# Altium PCB ReceiverPCB.PcbDoc
Units mm, origin at the board's own origin, x right, y up, seen from the top; angles counter-clockwise.
Board outline 69.85 x 65.28 mm, 2 copper layers (Top Layer, Bottom Layer); 15 components, 35 nets, 128 pads, 1 vias.
Unrouted connection lines stored in the file: 1.
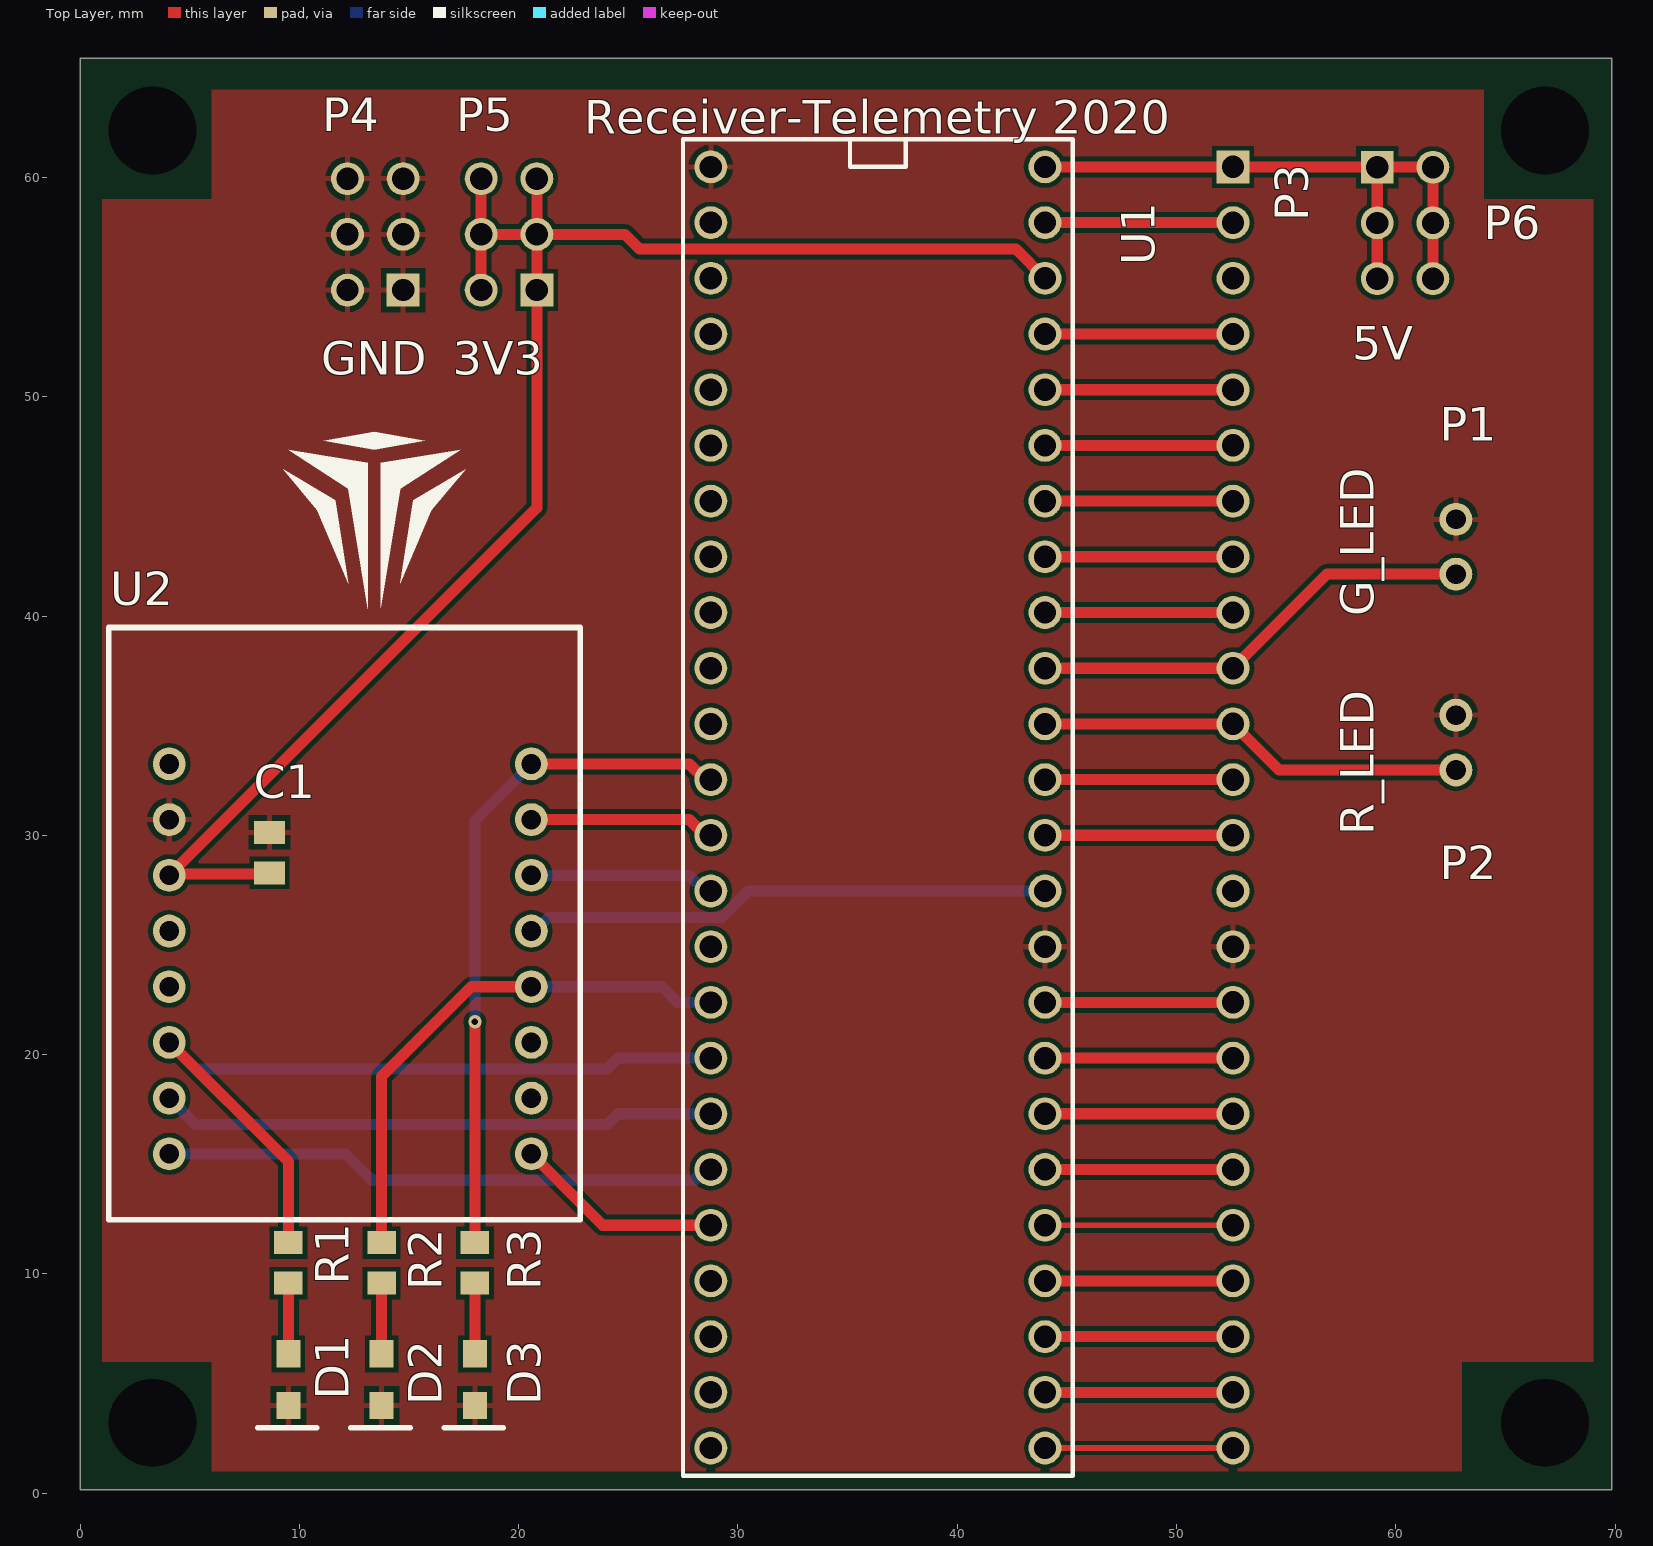
[diagram p0: Top Layer view]
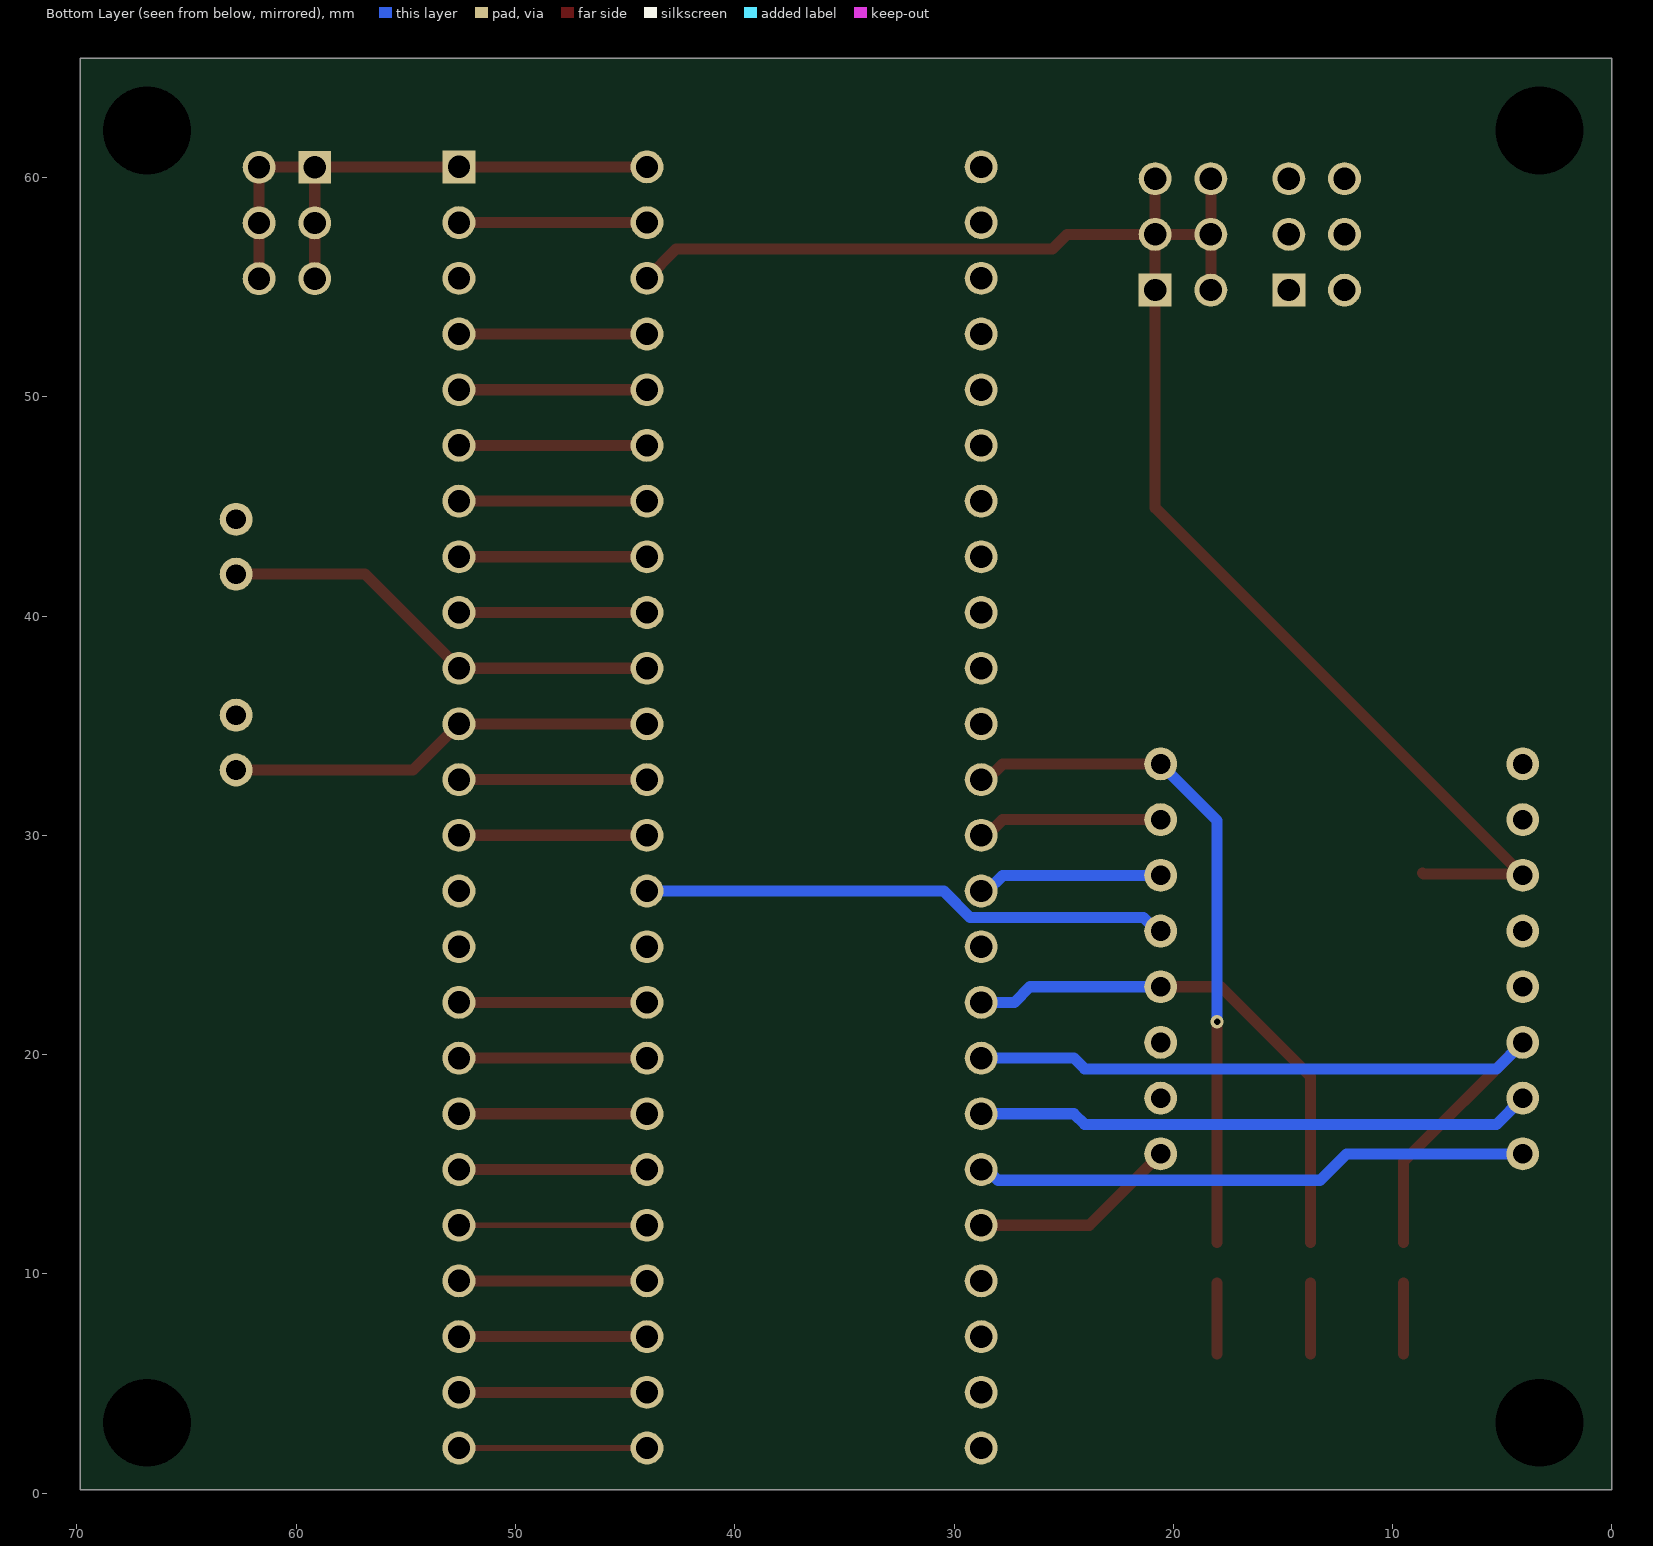
[diagram p1: Bottom Layer view, seen from below]

## Layer stack, top to bottom
Top Solder: solder mask 0.0102, Solder Resist, Dk 3.5
Top Layer: signal copper 0.0356
Dielectric 1: dielectric 0.32, FR-4, Dk 4.8
Bottom Layer: signal copper 0.0356
Bottom Solder: solder mask 0.0102, Solder Resist, Dk 3.5

## Board outline
0,0.163 0,65.441 69.85,65.441 69.85,0.163

## Design rules (kind name [scope] priority, off if disabled: settings)
Clearance [All] p1: gap=0.203 ignorepadtopadclearanceinfootprint=FALSE
HoleSize [All] p1: absolutevalues=TRUE maxlimit=25.4 minlimit=0.025 maxpercent=80.000 minpercent=20.000
PolygonConnect [All] p1: connectstyle=Relief reliefconductorwidth=0.254 reliefentries=4 polygonreliefangle="90 Angle" airgapwidth=0.254
RoutingVias [All] p1: holewidth=0.711 width=1.27 viastyle="Through Hole" minholewidth=0.711 minwidth=1.27 maxholewidth=0.711 maxwidth=1.27
SolderMaskExpansion [All] p1: expansion=0.102 istentingtop=FALSE
Width [All] p1: maxlimit=0.762 minlimit=0.254 preferedwidth=0.254
29 further rules are at their usual default settings.

## Components (designator, comment, footprint, x,y, rotation, side; value= is the part's Value field where it differs from the comment)
C1 "SMD" C_SMD_0805_pcb 8.636,29.21 r90 top value=100n
D1 "LED" D_LED_0805 9.5,6.35 r270 top
D2 "LED" D_LED_0805 13.75,6.35 r270 top
D3 "LED" D_LED_0805 18,6.35 r270 top
P1 "Red_LED" JST_SE_2PIN 62.738,32.98 r90 top
P2 "Green_LED" JST_SE_2PIN 62.738,41.91 r90 top
P3 "1x24_M" PIN_HEADER_M_1x24 52.575,4.6 r90 top
P4 "GND" PIN_HEADER_M_2x3 12.192,59.944 r270 top
P5 "+3V3" PIN_HEADER_M_2x3 18.288,59.944 r270 top
P6 "5V" PIN_HEADER_M_2x3 61.69,55.385 r90 top
R1 "SMD" R_SMD_0805_pcb 9.5,10.5 r90 top value=470
R2 "SMD" R_SMD_0805_pcb 13.75,10.5 r90 top value=470
R3 "SMD" R_SMD_0805_pcb 18,10.5 r90 top value=470
U1 "teensy_3.6" teensy_3.6 28.125,62.385 r0 top
U2 "LAMBDA80" LAMBDA62_SMT 4.065,15.475 r0 top

## Footprints (in the part's own frame and the unit in brackets; to place one, negate y for a bottom-side part, rotate by r counter-clockwise, add the part's x,y. Pads: shape width x height; smd on the part's side, far side on the other; paste and mask are expansions set on the pad)
C_SMD_0805_pcb [mm] "Chip Capacitor, 2-Leads, Body 2,00x1,25mm, IPC Medium Density"
  rect 1.05x1.4 smd: 1(-0.925,0) 2(0.925,0)
  body extent -1,-0.63 1,0.62, height 1.35
D_LED_0805 [mm]
  rect 1.25x1.1 smd: 1(0,0) 2(2.35,0)
  silkscreen extent 3.38,-1.4 3.38,1.3, body extent -0.3,-0.63 2.65,0.63, height 1
JST_SE_2PIN [mm]
  round 1.5 hole 0.9: 1(0,0) 2(2.5,0)
  body extent -2.45,-9.2 4.95,2.3, height 6.1
LAMBDA62_SMT [mm]
  round 1.5 hole 0.9: 1(0,17.78) 2(0,15.24) 3(0,12.7) 4(0,10.16) 5(0,7.62) 6(0,5.08) 7(0,2.54) 8(0,0) 9(16.51,0) 10(16.51,2.54) 11(16.51,5.08) 12(16.51,7.62) 13(16.51,10.16) 14(16.51,12.7) 15(16.51,15.24) 16(16.51,17.78)
  silkscreen extent -2.75,-3 18.75,24, body extent -2.79,-3.05 18.8,24.13, height 4
PIN_HEADER_M_1x24 [mm]
  round 1.5 hole 1.02: 1(-2.54,0) 2(0,0) 3(2.54,0) 4(5.08,0) 5(7.62,0) 6(10.16,0) 7(12.7,0) 8(15.24,0) 9(17.78,0) 10(20.32,0) 11(22.86,0) 12(25.4,0) 13(27.94,0) 14(30.48,0) 15(33.02,0) 16(35.56,0) 17(38.1,0) 18(40.64,0) 19(43.18,0) 20(45.72,0) 21(48.26,0) 22(50.8,0) 23(53.34,0)
  rect 1.5x1.5 hole 1.02: 24(55.88,0)
  body extent -3.81,-1.27 57.15,1.27, height 8.34
PIN_HEADER_M_2x3 [mm]
  rect 1.5x1.5 hole 1.02: 1(5.08,2.54)
  round 1.5 hole 1.02: 2(2.54,2.54) 3(0,2.54) 4(0,0) 5(2.54,0) 6(5.08,0)
  body extent -1.27,-1.27 6.35,3.81, height 8.34
R_SMD_0805_pcb [mm]
  rect 1.05x1.3 smd: 1(-0.925,0) 2(0.925,0)
  body extent -1,-0.6 1,0.6, height 0.65
teensy_3.6 [mm]
  round 1.5 hole 1.016: 0(0.635,-4.445) 1(0.635,-6.985) 2(0.635,-9.525) 3(0.635,-12.065) 4(0.635,-14.605) 5(0.635,-17.145) 6(0.635,-19.685) 7(0.635,-22.225) 8(0.635,-24.765) 9(0.635,-27.305) 10(0.635,-29.845) 11(0.635,-32.385) 12(0.635,-34.925) 13(15.875,-34.925) 14(15.875,-32.385) 15(15.875,-29.845) 16(15.875,-27.305) 17(15.875,-24.765) 18(15.875,-22.225) 19(15.875,-19.685) 20(15.875,-17.145) 21(15.875,-14.605) 22(15.875,-12.065) 23(15.875,-9.525) 24(0.635,-40.005) 25(0.635,-42.545) 26(0.635,-45.085) 27(0.635,-47.625) 28(0.635,-50.165) 29(0.635,-52.705) 30(0.635,-55.245) 31(0.635,-57.785) 32(0.635,-60.325) 33(15.875,-60.325) 34(15.875,-57.785) 35(15.875,-55.245) 36(15.875,-52.705) 37(15.875,-50.165) 38(15.875,-47.625) 39(15.875,-45.085) +3V3(0.635,-37.465) +3V3(15.875,-6.985) A21(15.875,-42.545) A22(15.875,-40.005) AGND(15.875,-4.445) GND(0.635,-1.905) GND(15.875,-37.465) VIN(15.875,-1.905)
  silkscreen extent -0.64,-61.59 17.14,-0.63, body extent -0.62,-61.66 17.16,0.7, height 7.49

## Part data
C1: library part C_SMD_0805
D1 D2 D3: library part D_LED_0805_SMD
P1 P2: library part JST_SE_2PIN
P3: library part PIN_HEADER_M_1x24
P4 P5 P6: library part PIN_HEADER_M_2x3
R1 R2 R3: library part R_SMD_0805
U2: library part LAMBDA_80_DIP

## Free pads (board coordinates)
  round 0.254 / inner round 0 / far side round 0 hole 4: 9(3.302,3.211) 10(3.302,62.139) 11(66.802,62.139) 12(66.802,3.211)

## Via types
v1: diameter 0.6, hole 0.3, Top Layer to Bottom Layer, tented both sides, 1 vias

## Nets (pads, with @x,y where several pads share a name; then routed paths per layer and width w, separated by ;. In a path a pad name is that pad's centre, name@x,y a point inside that pad or via, vN(x,y) a via of type N, cw(c..) or ccw(c..) an arc to the next point about the centre after c; other vN are vias at no path point)
3V3: C1.1 P3.22 P5.1 P5.2 P5.3 P5.4 P5.5 P5.6 U1.+3V3 U2.3 | length 74.9
  Top Layer w0.508: U2.3 U2.3@4.12,28.23 ; U2.3@4.154,28.084 U2.3@4.2,28.13 ; C1.1 8.581,28.23 U2.3@4.12,28.23 ; P5.6 P5.5 ; P5.4 P5.5 ; P5.3 P5.2 ; U1.+3V3@44,55.4 42.667,56.733 25.514,56.733 24.843,57.404 P5.2 ; U2.3@4.12,28.23 20.828,44.938 P5.1 P5.2 ; P5.5 P5.2
5V: P3.24 P6.1 P6.2 P6.3 P6.4 P6.5 P6.6 U1.VIN | length 27.9
  Top Layer w0.508: U1.VIN 44.008,60.473 61.683,60.473 P6.6 P6.5 P6.4 ; P6.3 P6.2 P6.1
GND: C1.2 D1.2 D2.2 D3.2 P1.2 P2.2 P3.10 P4.1 P4.2 P4.3 P4.4 P4.5 P4.6 U1.GND U2.2
NetD1_1: D1.1 R1.1 | length 3.2
  Top Layer w0.508: D1.1 R1.1
NetD2_1: D2.1 R2.1 | length 3.2
  Top Layer w0.508: D2.1 R2.1
NetD3_1: D3.1 R3.1 | length 3.2
  Top Layer w0.508: D3.1 R3.1
NetP1_1: P1.1 P3.14 U1.16 | length 19.6
  Top Layer w0.508: U1.16 P3.14 54.675,32.98 P1.1
NetP2_1: P2.1 P3.15 U1.17 | length 20.5
  Top Layer w0.508: U1.17 P3.15 56.865,41.91 P2.1
NetP3_1: P3.1 U1.33 | length 8.6
  Top Layer w0.254: U1.33 P3.1
NetP3_2: P3.2 U1.34 | length 8.6
  Top Layer w0.508: U1.34 P3.2
NetP3_3: P3.3 U1.35 | length 8.6
  Top Layer w0.508: U1.35 P3.3
NetP3_4: P3.4 U1.36 | length 8.6
  Top Layer w0.508: U1.36 P3.4
NetP3_5: P3.5 U1.37 | length 8.6
  Top Layer w0.254: U1.37 P3.5
NetP3_6: P3.6 U1.38 | length 8.6
  Top Layer w0.508: U1.38 P3.6
NetP3_7: P3.7 U1.39 | length 8.6
  Top Layer w0.508: U1.39 P3.7
NetP3_8: P3.8 U1.A21 | length 8.6
  Top Layer w0.508: U1.A21 P3.8
NetP3_9: P3.9 U1.A22 | length 8.6
  Top Layer w0.508: U1.A22 P3.9
NetP3_12: P3.12 U1.14 | length 8.6
  Top Layer w0.508: U1.14 P3.12
NetP3_13: P3.13 U1.15 | length 8.6
  Top Layer w0.508: U1.15 P3.13
NetP3_16: P3.16 U1.18 | length 8.6
  Top Layer w0.508: U1.18 P3.16
NetP3_17: P3.17 U1.19 | length 8.6
  Top Layer w0.508: U1.19 P3.17
NetP3_18: P3.18 U1.20 | length 8.6
  Top Layer w0.508: U1.20 P3.18
NetP3_19: P3.19 U1.21 | length 8.6
  Top Layer w0.508: U1.21 P3.19
NetP3_20: P3.20 U1.22 | length 8.6
  Top Layer w0.508: U1.22 P3.20
NetP3_21: P3.21 U1.23 | length 8.6
  Top Layer w0.508: U1.23 P3.21
NetP3_23: P3.23 U1.AGND | length 8.6
  Top Layer w0.508: U1.AGND P3.23
NetR1_2: R1.2 U1.25 U2.6 | length 36.8
  Top Layer w0.508: U2.6 9.5,15.12 R1.2
  Bottom Layer w0.508: U2.6 5.272,19.348 24.037,19.348 24.529,19.84 U1.25
NetR2_2: R2.2 U1.24 U2.12 | length 24.6
  Top Layer w0.508: R2.2 13.75,19 17.845,23.095 U2.12
  Bottom Layer w0.508: U2.12 26.533,23.095 27.248,22.38 U1.24
NetR3_2: R3.2 U1.10 U2.16 | length 31.4
  Top Layer w0.508: R3.2 v1(18,21.5) ; U2.16 27.777,33.255 28.492,32.54 U1.10
  Bottom Layer w0.508: v1(18,21.5) 18,30.68 U2.16
NetU1_11: U1.11 U2.15 | length 8.5
  Top Layer w0.508: U2.15 27.777,30.715 28.492,30 U1.11
NetU1_12: U1.12 U2.14 | length 8.5
  Bottom Layer w0.508: U2.14 27.777,28.175 28.492,27.46 U1.12
NetU1_13: U1.13 U2.13 | length 24.2
  Bottom Layer w0.508: U2.13 20.754,25.635 21.369,26.25 28.383,26.25 28.386,26.253 29.26,26.253 30.467,27.46 U1.13
NetU1_26: U1.26 U2.7 | length 25.4
  Bottom Layer w0.508: U2.7 5.272,16.808 24.037,16.808 24.529,17.3 U1.26
NetU1_27: U1.27 U2.8 | length 25.4
  Bottom Layer w0.508: U2.8 12.101,15.475 13.308,14.268 27.999,14.268 28.492,14.76 U1.27
NetU1_28: U1.28 U2.9 | length 9.5
  Top Layer w0.508: U2.9 23.83,12.22 U1.28
pads on no net: P3.11 U1.0 U1.1 U1.2 U1.3 U1.4 U1.5 U1.6 U1.7 U1.8 U1.9 U1.29 U1.30 U1.31 U1.32 U2.1 U2.4 U2.5 U2.10 U2.11

## Polygon pours and split planes (outlines as drawn)
no net on Top Overlay (solid): 13.419,47.576 11.118,47.984 13.419,48.393 15.72,47.984
no net on Top Overlay (solid): 13.122,40.338 13.122,46.982 9.484,47.576 12.231,45.794
no net on Top Overlay (solid): 13.716,40.375 13.716,46.982 17.354,47.576 14.607,45.794
no net on Top Overlay (solid): 12.231,41.488 11.637,45.275 9.262,46.685 10.821,44.829
no net on Top Overlay (solid): 14.607,41.488 15.201,45.275 17.576,46.685 16.017,44.829
GND on Top Layer "Top Layer-GND" (solid, pour order 6): 1,6 1,59 6,59 6,64 64,64 64,59 69,59 69,6 63,6 63,1 6,1 6,6

## Silkscreen, mask and mechanical layers (free items; w line width, h text height)
Top Overlay:
  text "Receiver-Telemetry 2020" at 23,62 h1.52
  text "GND" at 11,51 h1.52
  text "3V3" at 17,51 h1.52
  text "G_LED" at 59,40 h1.52 r90
  text "R_LED" at 59,30 h1.52 r90
Mechanical 1:
  lines w0.254: 0.254,0.417 69.596,0.417 69.596,65.187 0.254,65.187 0.254,0.417